# Altium PCB AICat V1.7 双面板 板厚1.6mm.PcbDoc (part 2 of 6)
Units mil, origin at the board's own origin, x right, y up, seen from the top; angles counter-clockwise.
Board outline 2778 x 2104 mil, 2 copper layers (Top Layer, Bottom Layer); 123 components, 84 nets, 332 pads, 255 vias.
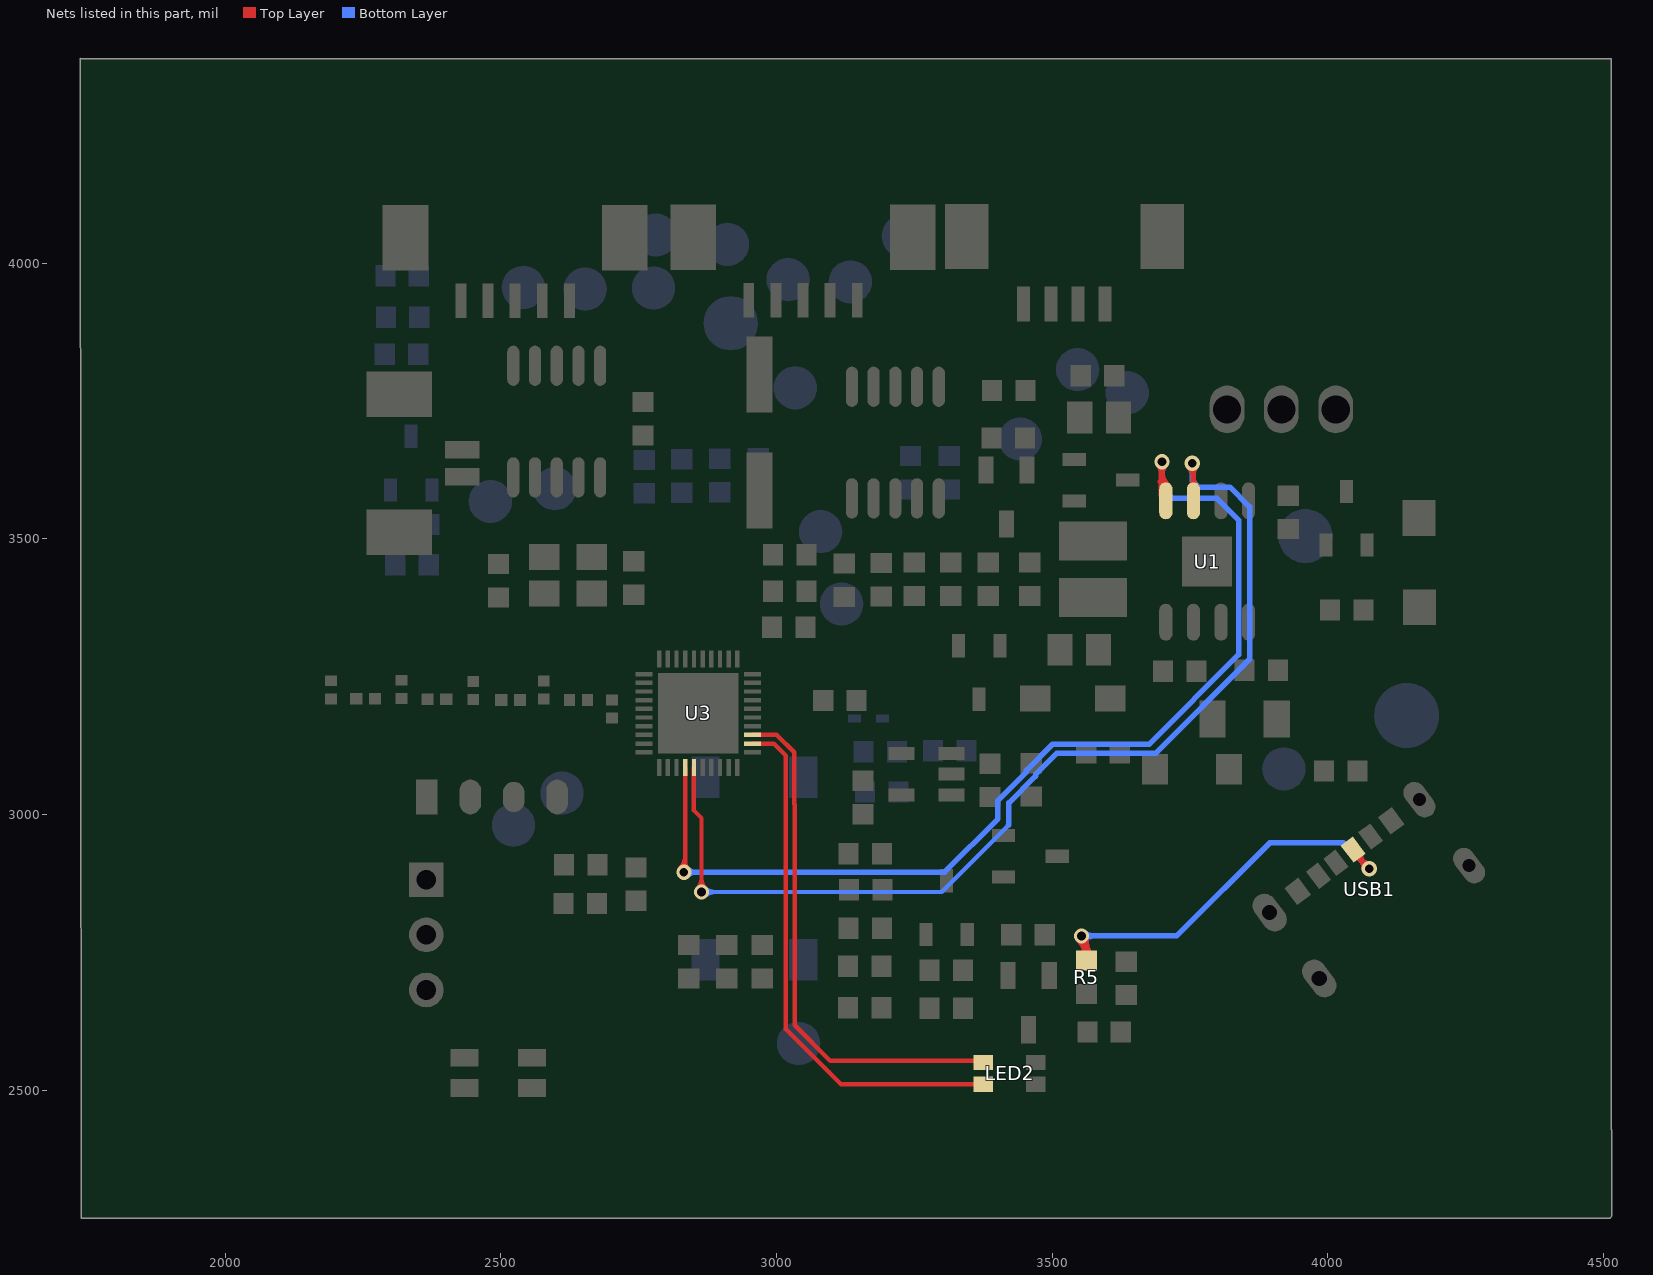
[diagram p2: the nets of this part, all layers, seen from the top]

## Via types
v1: diameter 27.56, hole 15.75, Top Layer to Bottom Layer, tented both sides, 255 vias

## Nets (pads, with @x,y where several pads share a name; then routed paths per layer and width w, separated by ;. In a path a pad name is that pad's centre, name@x,y a point inside that pad or via, vN(x,y) a via of type N, cw(c..) or ccw(c..) an arc to the next point about the centre after c; other vN are vias at no path point) (continued)
CC2: R5.1 USB1.B5 | length 1937.8
  Top Layer w10: v1(3553,2780) 3562,2771 R5.1@3562,2735.31 ; USB1.B5@4045.7,2936.58 4045.7,2931.3 v1(4075,2902) ; v1@3546.79,2773.79 cw(c3510.08,2737.08) R5.1@3562,2737.08 ; v1@3546.79,2773.79 cw(c3510.08,2737.08) R5.1@3562,2737.08 ; v1@3546.79,2773.79 cw(c3510.08,2737.08) R5.1@3562,2737.08 ; v1@3546.79,2773.79 cw(c3510.08,2737.08) R5.1@3562,2737.08 ; v1@3546.79,2773.79 cw(c3510.08,2737.08) R5.1@3562,2737.08 ; R5.1@3552.59,2744.72 ccw(c3529.87,2767.44) 3562,2767.44 ; R5.1@3552.59,2744.72 ccw(c3529.87,2767.44) 3562,2767.44 ; R5.1@3552.59,2744.72 ccw(c3529.87,2767.44) 3562,2767.44 ; R5.1@3552.59,2744.72 ccw(c3529.87,2767.44) 3562,2767.44 ; R5.1@3552.59,2744.72 ccw(c3529.87,2767.44) 3562,2767.44 ; v1@3553.86,2780.86 cw(c3534.22,2761.22) 3562,2761.22 ; v1@3553.86,2780.86 cw(c3534.22,2761.22) 3562,2761.22 ; v1@3553.86,2780.86 cw(c3534.22,2761.22) 3562,2761.22 ; v1@3553.86,2780.86 cw(c3534.22,2761.22) 3562,2761.22 ; v1@3553.86,2780.86 cw(c3534.22,2761.22) 3562,2761.22 ; 3562,2767.44 ccw(c3594.13,2767.44) R5.1@3571.41,2744.72 ; 3562,2767.44 ccw(c3594.13,2767.44) R5.1@3571.41,2744.72 ; 3562,2767.44 ccw(c3594.13,2767.44) R5.1@3571.41,2744.72 ; 3562,2767.44 ccw(c3594.13,2767.44) R5.1@3571.41,2744.72 ; 3562,2767.44 ccw(c3594.13,2767.44) R5.1@3571.41,2744.72 ; USB1.B5@4049.26,2923.09 cw(c4049.26,2911.84) 4057.21,2919.79 ; USB1.B5@4049.26,2923.09 cw(c4049.26,2911.84) 4057.21,2919.79 ; USB1.B5@4049.26,2923.09 cw(c4049.26,2911.84) 4057.21,2919.79 ; USB1.B5@4049.26,2923.09 cw(c4049.26,2911.84) 4057.21,2919.79 ; USB1.B5@4049.26,2923.09 cw(c4049.26,2911.84) 4057.21,2919.79 ; USB1.B5@4058.03,2931.87 ccw(c4089.18,2931.87) v1@4067.16,2909.84 ; USB1.B5@4058.03,2931.87 ccw(c4089.18,2931.87) v1@4067.16,2909.84 ; USB1.B5@4058.03,2931.87 ccw(c4089.18,2931.87) v1@4067.16,2909.84 ; USB1.B5@4058.03,2931.87 ccw(c4089.18,2931.87) v1@4067.16,2909.84 ; USB1.B5@4058.03,2931.87 ccw(c4089.18,2931.87) v1@4067.16,2909.84 ; 4060.01,2916.99 cw(c4045.02,2902) v1@4066.22,2902 ; 4060.01,2916.99 ccw(c4075,2931.98) v1@4075,2910.78 ; 4060.01,2916.99 cw(c4045.02,2902) v1@4066.22,2902 ; 4060.01,2916.99 ccw(c4075,2931.98) v1@4075,2910.78 ; 4060.01,2916.99 ccw(c4075,2931.98) v1@4075,2910.78 ; 4060.01,2916.99 cw(c4045.02,2902) v1@4066.22,2902 ; 4060.01,2916.99 ccw(c4075,2931.98) v1@4075,2910.78 ; 4060.01,2916.99 cw(c4045.02,2902) v1@4066.22,2902 ; 4060.01,2916.99 ccw(c4075,2931.98) v1@4075,2910.78 ; 4060.01,2916.99 cw(c4045.02,2902) v1@4066.22,2902
  Bottom Layer w10: v1(3553,2780) 3725.72,2780 3894.72,2949 4028,2949 v1(4075,2902) ; v1@3559.21,2773.79 cw(c3574.2,2758.8) 3574.2,2780 ; v1@3559.21,2773.79 cw(c3574.2,2758.8) 3574.2,2780 ; v1@3559.21,2773.79 cw(c3574.2,2758.8) 3574.2,2780 ; v1@3559.21,2773.79 cw(c3574.2,2758.8) 3574.2,2780 ; v1@3559.21,2773.79 cw(c3574.2,2758.8) 3574.2,2780 ; v1@3559.21,2786.21 ccw(c3574.2,2801.2) 3574.2,2780 ; v1@3559.21,2786.21 ccw(c3574.2,2801.2) 3574.2,2780 ; v1@3559.21,2786.21 ccw(c3574.2,2801.2) 3574.2,2780 ; v1@3559.21,2786.21 ccw(c3574.2,2801.2) 3574.2,2780 ; v1@3559.21,2786.21 ccw(c3574.2,2801.2) 3574.2,2780 ; 4060.01,2916.99 cw(c4045.02,2902) v1@4066.22,2902 ; 4060.01,2916.99 ccw(c4075,2931.98) v1@4075,2910.78 ; 4060.01,2916.99 cw(c4045.02,2902) v1@4066.22,2902 ; 4060.01,2916.99 ccw(c4075,2931.98) v1@4075,2910.78 ; 4060.01,2916.99 ccw(c4075,2931.98) v1@4075,2910.78 ; 4060.01,2916.99 cw(c4045.02,2902) v1@4066.22,2902 ; 4060.01,2916.99 ccw(c4075,2931.98) v1@4075,2910.78 ; 4060.01,2916.99 cw(c4045.02,2902) v1@4066.22,2902 ; 4060.01,2916.99 ccw(c4075,2931.98) v1@4075,2910.78 ; 4060.01,2916.99 cw(c4045.02,2902) v1@4066.22,2902
CHAR_G: LED2.3 U3.12 | length 975.4
  Top Layer w8: U3.12@2956.55,3128.79 2994.99,3128.79 3017,3106.79 3017,2611 3088,2540 ; 3095.32,2532.68 3088,2540 ; LED2.3@3375.3,2511 3117,2511 3088,2540
CHARG_EN: U1.8 U3.4 | length 2872.1
  Top Layer w8: v1(2832,2895.63) 2834.53,2898.16 2834.53,2975 ; 2834.53,2937.53 2834.53,2975 ; U3.4@2834.53,3085.51 2834.53,2975 ; v1@2825.08,2902.55 ccw(c2802.29,2925.34) 2834.53,2925.34 ; v1@2825.08,2902.55 ccw(c2802.29,2925.34) 2834.53,2925.34 ; v1@2825.08,2902.55 ccw(c2802.29,2925.34) 2834.53,2925.34 ; v1@2825.08,2902.55 ccw(c2802.29,2925.34) 2834.53,2925.34 ; 2834.53,2913.14 ccw(c2849.51,2913.14) v1@2838.92,2902.55 ; 2834.53,2913.14 ccw(c2849.51,2913.14) v1@2838.92,2902.55 ; 2834.53,2913.14 ccw(c2849.51,2913.14) v1@2838.92,2902.55 ; 2834.53,2913.14 ccw(c2849.51,2913.14) v1@2838.92,2902.55
  Top Layer w10: U1.8@3698,3579 v1@3698,3635 ; 3698,3602 3706,3594 U1.8@3706,3592 ; v1@3692.79,3633.79 cw(c3680.22,3621.22) 3698,3621.22 ; v1@3692.79,3633.79 cw(c3680.22,3621.22) 3698,3621.22 ; v1@3692.79,3633.79 cw(c3680.22,3621.22) 3698,3621.22 ; v1@3692.79,3633.79 cw(c3680.22,3621.22) 3698,3621.22 ; v1@3692.79,3633.79 cw(c3680.22,3621.22) 3698,3621.22 ; 3696.23,3603.77 cw(c3687.92,3595.45) U1.8@3699.25,3592.33 ; 3696.23,3603.77 cw(c3687.92,3595.45) U1.8@3699.25,3592.33 ; 3696.23,3603.77 cw(c3687.92,3595.45) U1.8@3699.25,3592.33 ; 3696.23,3603.77 cw(c3687.92,3595.45) U1.8@3699.25,3592.33 ; 3696.23,3603.77 cw(c3687.92,3595.45) U1.8@3699.25,3592.33 ; 3698,3602.54 ccw(c3718.07,3602.54) U1.8@3703.88,3588.34 ; 3698,3602.54 ccw(c3718.07,3602.54) U1.8@3703.88,3588.34 ; 3698,3602.54 ccw(c3718.07,3602.54) U1.8@3703.88,3588.34 ; 3698,3602.54 ccw(c3718.07,3602.54) U1.8@3703.88,3588.34 ; 3698,3602.54 ccw(c3718.07,3602.54) U1.8@3703.88,3588.34 ; 3698,3616.39 cw(c3722.61,3616.39) v1@3705.21,3633.79 ; 3698,3616.39 cw(c3722.61,3616.39) v1@3705.21,3633.79 ; 3698,3616.39 cw(c3722.61,3616.39) v1@3705.21,3633.79 ; 3698,3616.39 cw(c3722.61,3616.39) v1@3705.21,3633.79 ; 3698,3616.39 cw(c3722.61,3616.39) v1@3705.21,3633.79 ; v1@3698,3626.68 ccw(c3742.21,3626.68) U1.8@3710.95,3595.41 ; v1@3698,3626.68 ccw(c3742.21,3626.68) U1.8@3710.95,3595.41 ; v1@3698,3626.68 ccw(c3742.21,3626.68) U1.8@3710.95,3595.41 ; v1@3698,3626.68 ccw(c3742.21,3626.68) U1.8@3710.95,3595.41 ; v1@3698,3626.68 ccw(c3742.21,3626.68) U1.8@3710.95,3595.41
  Bottom Layer w10: v1(2832,2895.63) 3304.63,2895.63 3401.4,2992.4 3401.4,3025.48 3453,3077.08 3453,3080.08 3500.92,3128 3676,3128 3838,3290 3838,3534 3798,3574 3717,3574 3699,3592 v1(3699,3640) ; v1@2838.21,2889.42 cw(c2853.2,2874.43) 2853.2,2895.63 ; v1@2838.21,2889.42 cw(c2853.2,2874.43) 2853.2,2895.63 ; v1@2838.21,2889.42 cw(c2853.2,2874.43) 2853.2,2895.63 ; v1@2838.21,2889.42 cw(c2853.2,2874.43) 2853.2,2895.63 ; v1@2838.21,2901.84 ccw(c2853.2,2916.83) 2853.2,2895.63 ; v1@2838.21,2901.84 ccw(c2853.2,2916.83) 2853.2,2895.63 ; v1@2838.21,2901.84 ccw(c2853.2,2916.83) 2853.2,2895.63 ; v1@2838.21,2901.84 ccw(c2853.2,2916.83) 2853.2,2895.63 ; v1@3692.79,3633.79 cw(c3677.8,3618.8) 3699,3618.8 ; v1@3692.79,3633.79 cw(c3677.8,3618.8) 3699,3618.8 ; v1@3692.79,3633.79 cw(c3677.8,3618.8) 3699,3618.8 ; v1@3692.79,3633.79 cw(c3677.8,3618.8) 3699,3618.8 ; v1@3692.79,3633.79 cw(c3677.8,3618.8) 3699,3618.8 ; 3699,3618.8 cw(c3720.2,3618.8) v1@3705.21,3633.79 ; 3699,3618.8 cw(c3720.2,3618.8) v1@3705.21,3633.79 ; 3699,3618.8 cw(c3720.2,3618.8) v1@3705.21,3633.79 ; 3699,3618.8 cw(c3720.2,3618.8) v1@3705.21,3633.79 ; 3699,3618.8 cw(c3720.2,3618.8) v1@3705.21,3633.79
CHRG_R: LED2.1 U3.13 | length 952.8
  Top Layer w8: U3.13@2956.55,3144.54 3000.46,3144.54 3032,3113 3032,3019 ; 3033,3018 3033,2618 3097.09,2553.91 3371.76,2553.91 LED2.1@3375.3,2550.37
CHRG_STATE: U1.7 U3.5 | length 2679.1
  Top Layer w8: U3.5@2850.28,3085.51 2850.28,3007.51 2864,2993.79 v1(2864,2859.63) ; v1@2857.08,2866.55 ccw(c2840.39,2883.24) 2864,2883.24 ; v1@2857.08,2866.55 ccw(c2840.39,2883.24) 2864,2883.24 ; v1@2857.08,2866.55 ccw(c2840.39,2883.24) 2864,2883.24 ; v1@2857.08,2866.55 ccw(c2840.39,2883.24) 2864,2883.24 ; 2864,2883.24 ccw(c2887.61,2883.24) v1@2870.92,2866.55 ; 2864,2883.24 ccw(c2887.61,2883.24) v1@2870.92,2866.55 ; 2864,2883.24 ccw(c2887.61,2883.24) v1@2870.92,2866.55 ; 2864,2883.24 ccw(c2887.61,2883.24) v1@2870.92,2866.55
  Top Layer w10: U1.7@3756,3569 3756,3627 v1@3757,3628 ; v1@3747.79,3630.79 cw(c3727.98,3610.98) 3756,3610.98 ; v1@3747.79,3630.79 cw(c3727.98,3610.98) 3756,3610.98 ; v1@3747.79,3630.79 cw(c3727.98,3610.98) 3756,3610.98 ; v1@3747.79,3630.79 cw(c3727.98,3610.98) 3756,3610.98 ; v1@3747.79,3630.79 cw(c3727.98,3610.98) 3756,3610.98 ; U1.7@3751.05,3595.41 ccw(c3739.1,3607.36) 3756,3607.36 ; U1.7@3751.05,3595.41 ccw(c3739.1,3607.36) 3756,3607.36 ; U1.7@3751.05,3595.41 ccw(c3739.1,3607.36) 3756,3607.36 ; U1.7@3751.05,3595.41 ccw(c3739.1,3607.36) 3756,3607.36 ; U1.7@3751.05,3595.41 ccw(c3739.1,3607.36) 3756,3607.36 ; 3756,3607.36 ccw(c3772.9,3607.36) U1.7@3760.95,3595.41 ; 3756,3607.36 ccw(c3772.9,3607.36) U1.7@3760.95,3595.41 ; 3756,3607.36 ccw(c3772.9,3607.36) U1.7@3760.95,3595.41 ; 3756,3607.36 ccw(c3772.9,3607.36) U1.7@3760.95,3595.41 ; 3756,3607.36 ccw(c3772.9,3607.36) U1.7@3760.95,3595.41 ; 3756,3620.63 cw(c3770.37,3620.63) v1@3760.21,3630.79 ; 3756,3620.63 cw(c3770.37,3620.63) v1@3760.21,3630.79 ; 3756,3620.63 cw(c3770.37,3620.63) v1@3760.21,3630.79 ; 3756,3620.63 cw(c3770.37,3620.63) v1@3760.21,3630.79 ; 3756,3620.63 cw(c3770.37,3620.63) v1@3760.21,3630.79
  Bottom Layer w8: v1(2864,2859.63) 3299.63,2859.63 3420.4,2980.4 ; v1@2870.92,2852.71 cw(c2887.61,2836.02) 2887.61,2859.63 ; v1@2870.92,2852.71 cw(c2887.61,2836.02) 2887.61,2859.63 ; v1@2870.92,2852.71 cw(c2887.61,2836.02) 2887.61,2859.63 ; v1@2870.92,2852.71 cw(c2887.61,2836.02) 2887.61,2859.63 ; v1@2870.92,2866.55 ccw(c2887.61,2883.24) 2887.61,2859.63 ; v1@2870.92,2866.55 ccw(c2887.61,2883.24) 2887.61,2859.63 ; v1@2870.92,2866.55 ccw(c2887.61,2883.24) 2887.61,2859.63 ; v1@2870.92,2866.55 ccw(c2887.61,2883.24) 2887.61,2859.63
  Bottom Layer w10: 3420.4,2980.4 3421.4,2981.4 3421.4,3021.44 3470,3070.04 3470,3073.04 3507.96,3111 3687.28,3111 3858,3281.72 3858,3558 3822,3594 3765,3594 3754,3605 v1(3754,3637) ; v1@3747.79,3630.79 cw(c3732.8,3615.8) 3754,3615.8 ; v1@3747.79,3630.79 cw(c3732.8,3615.8) 3754,3615.8 ; v1@3747.79,3630.79 cw(c3732.8,3615.8) 3754,3615.8 ; v1@3747.79,3630.79 cw(c3732.8,3615.8) 3754,3615.8 ; v1@3747.79,3630.79 cw(c3732.8,3615.8) 3754,3615.8 ; 3754,3615.8 cw(c3775.2,3615.8) v1@3760.21,3630.79 ; 3754,3615.8 cw(c3775.2,3615.8) v1@3760.21,3630.79 ; 3754,3615.8 cw(c3775.2,3615.8) v1@3760.21,3630.79 ; 3754,3615.8 cw(c3775.2,3615.8) v1@3760.21,3630.79 ; 3754,3615.8 cw(c3775.2,3615.8) v1@3760.21,3630.79